# Altium PCB PCB2.PcbDoc (part 2 of 2)
Units mm, origin at the board's own origin, x right, y up, seen from the top; angles counter-clockwise.
Board outline 218 x 32 mm, 2 copper layers (Top Layer, Bottom Layer), stack 0.98 mm thick; 135 components, 91 nets, 363 pads, 97 vias.
Unrouted connection lines stored in the file: 1.
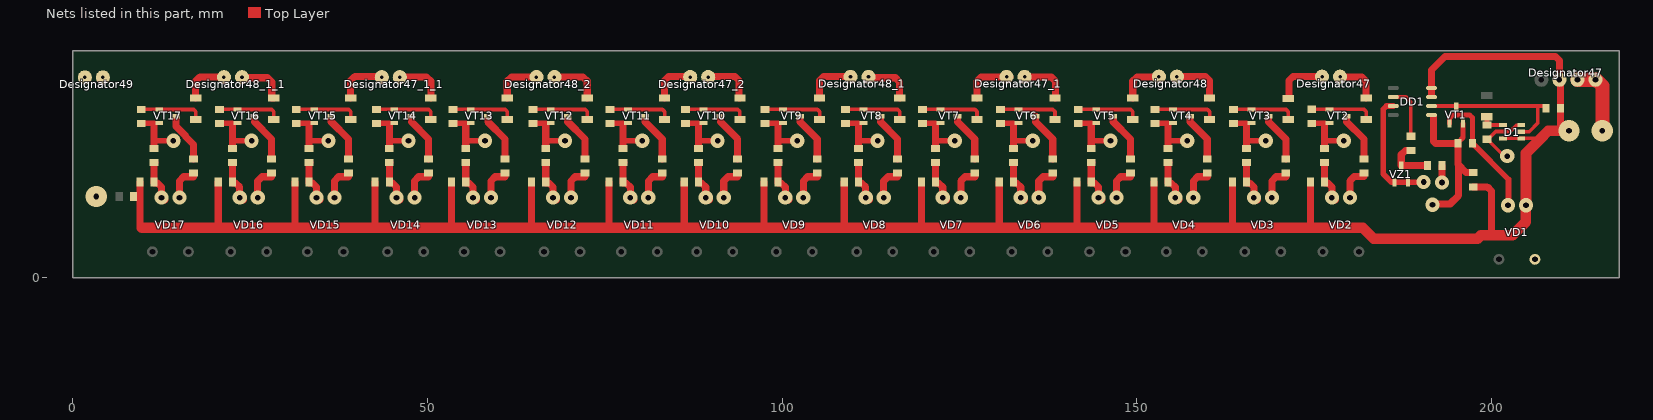
[diagram p2: the nets of this part, all layers, seen from the top]

## Via types
v1: diameter 2, hole 0.8, Top Layer to Bottom Layer, 54 vias
v2: diameter 3, hole 0.8, Top Layer to Bottom Layer, 39 vias
v3: diameter 5, hole 0.8, Top Layer to Bottom Layer, 2 vias
v4: diameter 7, hole 0.8, Top Layer to Bottom Layer, 2 vias

## Nets (pads, with @x,y where several pads share a name; then routed paths per layer and width w, separated by ;. In a path a pad name is that pad's centre, name@x,y a point inside that pad or via, vN(x,y) a via of type N, cw(c..) or ccw(c..) an arc to the next point about the centre after c; other vN are vias at no path point)
GND: C1.1 C2.1 C3.1 C4.1 C5.1 C6.1 C7.1 C8.1 C9.1 C10.1 C11.1 C12.1 C13.1 C14.1 C15.1 C16.1 C17.1 D1.3 DD1.5 Designator47.3 Designator47.4 Designator49.1 Designator49.2 R2.1 R3.1 R7.1 R11.1 R15.1 R19.1 R23.1 R27.1 R31.1 R35.1 R39.1 R43.1 R47.1 R51.1 R55.1 R59.1 R63.1 R67.1 VT1.2 VT2.2 VT3.2 VT4.2 VT5.2 VT6.2 VT7.2 VT8.2 VT9.2 VT10.2 VT11.2 VT12.2 VT13.2 VT14.2 VT15.2 VT16.2 VT17.2 | length 168.2
  Top Layer w0.5: R2.1@199.375,19.525 R2.1@199.5,19.525 ; R2.1@199.415,19.525 R2.1@199.5,19.525 ; v1(202.225,17.15) 201.79,17.15 199.75,19.19 199.75,19.275 R2.1@199.5,19.525 ; D1.3@204.2,21.55 204.15,21.5 203.475,21.5 202.6,20.625 200.6,20.625 R2.1@199.5,19.525
  Top Layer w0.7: R3.1@195.3,18.975 195.3,19.1 195.975,19.775 VT1.2@195.975,21.75
  Top Layer w0.8: R67.1@9.65,21.75 9.688,21.788 11.47,21.788 ; 11.47,19.325 v1(14.175,19.325) ; R63.1@20.68,21.75 20.718,21.788 22.5,21.788 ; 22.5,19.325 v1(25.205,19.325) ; R59.1@31.5,21.75 31.538,21.788 33.32,21.788 ; 33.32,19.325 v1(36.025,19.325) ; R55.1@42.8,21.75 42.838,21.788 44.62,21.788 ; 44.62,19.325 v1(47.325,19.325) ; R51.1@53.58,21.75 53.618,21.788 55.4,21.788 ; 55.4,19.325 v1(58.105,19.325) ; R47.1@64.85,21.75 64.888,21.788 66.67,21.788 ; 66.67,19.325 v1(69.375,19.325) ; R43.1@75.75,21.75 75.788,21.788 77.57,21.788 ; 77.57,19.325 v1(80.275,19.325) ; R39.1@86.38,21.75 86.418,21.788 88.2,21.788 ; 88.2,19.325 v1(90.905,19.325) ; R35.1@97.6,21.75 97.638,21.788 99.42,21.788 ; 99.42,19.325 v1(102.125,19.325) ; R31.1@108.93,21.75 108.968,21.788 110.75,21.788 ; 110.75,19.325 v1(113.455,19.325) ; R27.1@119.8,21.75 119.838,21.788 121.62,21.788 ; 121.62,19.325 v1(124.325,19.325) ; R23.1@130.79,21.75 130.828,21.788 132.61,21.788 ; 132.61,19.325 v1(135.315,19.325) ; R19.1@141.75,21.75 141.788,21.788 143.57,21.788 ; 143.57,19.325 v1(146.275,19.325) ; R15.1@152.58,21.75 152.618,21.788 154.4,21.788 ; 154.4,19.325 v1(157.105,19.325) ; R11.1@163.65,21.75 163.688,21.788 165.47,21.788 ; 165.47,19.325 v1(168.175,19.325) ; R7.1@174.655,21.755 174.693,21.793 176.475,21.793 ; 176.475,19.33 v1(179.18,19.33)
  Top Layer w1: C17.1@11.47,18.25 11.47,19.325 11.47,21.475 ; C16.1@22.5,18.25 22.5,19.325 22.5,21.475 ; C15.1@33.32,18.25 33.32,19.325 33.32,21.475 ; C14.1@44.62,18.25 44.62,19.325 44.62,21.475 ; C13.1@55.4,18.25 55.4,19.325 55.4,21.475 ; C12.1@66.67,18.25 66.67,19.325 66.67,21.475 ; C11.1@77.57,18.25 77.57,19.325 77.57,21.475 ; C10.1@88.2,18.25 88.2,19.325 88.2,21.475 ; C9.1@99.42,18.25 99.42,19.325 99.42,21.475 ; C8.1@110.75,18.25 110.75,19.325 110.75,21.475 ; C7.1@121.62,18.25 121.62,19.325 121.62,21.475 ; C6.1@132.61,18.25 132.61,19.325 132.61,21.475 ; C5.1@143.57,18.25 143.57,19.325 143.57,21.475 ; C4.1@154.4,18.25 154.4,19.325 154.4,21.475 ; C3.1@165.47,18.25 165.47,19.325 165.47,21.475 ; C2.1@176.475,18.255 176.475,19.33 176.475,21.48 ; v1(191.68,10.305) 191.805,10.43 194.18,10.43 195.325,11.575 195.325,15.925 ; DD1.5@191.825,22.745 191.825,19.24 192.132,18.932 R3.1@195.3,18.932 ; R3.1@195.3,18.975 R3.1@195.3,18.932 ; C1.1@197.425,14.825 196.425,14.825 195.325,15.925 ; R3.1@195.3,18.932 195.3,15.95 195.325,15.925
  Top Layer w2: Designator47.3@212.11,27.925 Designator47.4@214.65,27.925 214.728,27.925 215.625,27.029 v2(215.625,20.725)
  other v2: 3.3,11.45
NetC2_2: C2.2 R4.1 VD2.1 | length 6.3
  Top Layer w1: C2.2@176.6,16.255 C2.2@176.475,16.255 R4.1@176.475,13.505 176.475,13.38 176.914,13.38 177.5,12.794 177.5,11.5 VD2.1@178,11
  other v1: 177.5,11.305
NetC3_2: C3.2 R8.1 VD3.1 | length 6.3
  Top Layer w1: C3.2@165.595,16.25 C3.2@165.47,16.25 R8.1@165.47,13.5 165.47,13.375 165.909,13.375 166.495,12.789 166.495,11.495 VD3.1@166.995,10.995
  other v1: 166.495,11.3
NetC4_2: C4.2 R12.1 VD4.1 | length 6.3
  Top Layer w1: C4.2@154.525,16.25 C4.2@154.4,16.25 R12.1@154.4,13.5 154.4,13.375 154.839,13.375 155.425,12.789 155.425,11.495 VD4.1@155.925,10.995
  other v1: 155.425,11.3
NetC5_2: C5.2 R16.1 VD5.1 | length 6.3
  Top Layer w1: C5.2@143.695,16.25 C5.2@143.57,16.25 R16.1@143.57,13.5 143.57,13.375 144.009,13.375 144.595,12.789 144.595,11.495 VD5.1@145.095,10.995
  other v1: 144.595,11.3
NetC6_2: C6.2 R20.1 VD6.1 | length 6.3
  Top Layer w1: C6.2@132.735,16.25 C6.2@132.61,16.25 R20.1@132.61,13.5 132.61,13.375 133.049,13.375 133.635,12.789 133.635,11.495 VD6.1@134.135,10.995
  other v1: 133.635,11.3
NetC7_2: C7.2 R24.1 VD7.1 | length 6.3
  Top Layer w1: C7.2@121.745,16.25 C7.2@121.62,16.25 R24.1@121.62,13.5 121.62,13.375 122.059,13.375 122.645,12.789 122.645,11.495 VD7.1@123.145,10.995
  other v1: 122.645,11.3
NetC8_2: C8.2 R28.1 VD8.1 | length 6.3
  Top Layer w1: C8.2@110.875,16.25 C8.2@110.75,16.25 R28.1@110.75,13.5 110.75,13.375 111.189,13.375 111.775,12.789 111.775,11.495 VD8.1@112.275,10.995
  other v1: 111.775,11.3
NetC9_2: C9.2 R32.1 VD9.1 | length 6.3
  Top Layer w1: C9.2@99.545,16.25 C9.2@99.42,16.25 R32.1@99.42,13.5 99.42,13.375 99.859,13.375 100.445,12.789 100.445,11.495 VD9.1@100.945,10.995
  other v1: 100.445,11.3
NetC10_2: C10.2 R36.1 VD10.1 | length 6.3
  Top Layer w1: C10.2@88.325,16.25 C10.2@88.2,16.25 R36.1@88.2,13.5 88.2,13.375 88.639,13.375 89.225,12.789 89.225,11.495 VD10.1@89.725,10.995
  other v1: 89.225,11.3
NetC11_2: C11.2 R40.1 VD11.1 | length 6.3
  Top Layer w1: C11.2@77.695,16.25 C11.2@77.57,16.25 R40.1@77.57,13.5 77.57,13.375 78.009,13.375 78.595,12.789 78.595,11.495 VD11.1@79.095,10.995
  other v1: 78.595,11.3
NetC12_2: C12.2 R44.1 VD12.1 | length 6.3
  Top Layer w1: C12.2@66.795,16.25 C12.2@66.67,16.25 R44.1@66.67,13.5 66.67,13.375 67.109,13.375 67.695,12.789 67.695,11.495 VD12.1@68.195,10.995
  other v1: 67.695,11.3
NetC13_2: C13.2 R48.1 VD13.1 | length 6.3
  Top Layer w1: C13.2@55.525,16.25 C13.2@55.4,16.25 R48.1@55.4,13.5 55.4,13.375 55.839,13.375 56.425,12.789 56.425,11.495 VD13.1@56.925,10.995
  other v1: 56.425,11.3
NetC14_2: C14.2 R52.1 VD14.1 | length 6.3
  Top Layer w1: C14.2@44.745,16.25 C14.2@44.62,16.25 R52.1@44.62,13.5 44.62,13.375 45.059,13.375 45.645,12.789 45.645,11.495 VD14.1@46.145,10.995
  other v1: 45.645,11.3
NetC15_2: C15.2 R56.1 VD15.1 | length 6.3
  Top Layer w1: C15.2@33.445,16.25 C15.2@33.32,16.25 R56.1@33.32,13.5 33.32,13.375 33.759,13.375 34.345,12.789 34.345,11.495 VD15.1@34.845,10.995
  other v1: 34.345,11.3
NetC16_2: C16.2 R60.1 VD16.1 | length 6.3
  Top Layer w1: C16.2@22.625,16.25 C16.2@22.5,16.25 R60.1@22.5,13.5 22.5,13.375 22.939,13.375 23.525,12.789 23.525,11.495 VD16.1@24.025,10.995
  other v1: 23.525,11.3
NetC17_2: C17.2 R64.1 VD17.1 | length 6.3
  Top Layer w1: C17.2@11.595,16.25 C17.2@11.47,16.25 R64.1@11.47,13.5 11.47,13.375 11.909,13.375 12.495,12.789 12.495,11.495 VD17.1@12.995,10.995
  other v1: 12.495,11.3
NetD1_2: D1.2 DD1.6 R1.1 VT1.3 | length 21.7
  Top Layer w0.5: DD1.6@191.55,24.215 206.54,24.215 ; D1.2@204.2,20.6 205.325,20.6 206.54,21.815 206.54,24.215 ; R1.1@207.7,23.8 207.69,23.79 207.69,23.975 207.45,24.215 206.54,24.215
NetD1_4: D1.4 R2.2 R68.2 | length 3.4
  Top Layer w0.5: R2.2@199.375,21.525 199.388,21.537 201.587,21.537 D1.4@201.6,21.55
  Top Layer w0.7: R68.2@199.335,22.7 199.355,22.68 199.355,21.545 R2.2@199.375,21.525
NetDD1_2: DD1.2 R1.2.1 | length 7.6
  Top Layer w0.5: DD1.2@186.15,25.485 187.94,25.485 188.625,24.8 R1.2.1@188.625,19.95
NetDD1_3: DD1.3 VZ1.1 VZ1.2 | length 16.6
  Top Layer w0.8: 186.025,13.475 185.917,13.475 184.725,14.667 184.725,23.746 185.194,24.215 DD1.3@186.15,24.215 ; VZ1.1@186.325,13.425 186.37,13.47 188.225,13.47 190.38,13.47 v1(190.425,13.515)
NetR1.1_1: R1.1.1 R1.2.2 VZ1.3 | length 6.9
  Top Layer w1: R1.2.2@188.625,17.95 187.861,17.95 187.275,17.364 VZ1.3@187.275,15.825 191,15.825 R1.1.1@191,15.85
NetR1.1_2: R1.1.2 | length 2.4
  Top Layer w1: R1.1.2@193,15.85 193,13.454 v1(193.025,13.429)
NetR3_2: R3.2 VD1.1 VT1.1 | length 18.8
  Top Layer w0.7: VT1.1@194.075,21.75 194.075,22.525 194.525,22.975 196.89,22.975 197.3,22.565 R3.2@197.3,18.975
  Top Layer w0.8: R3.2@197.3,18.85 197.4,18.75 197.525,18.75 202.4,13.875 202.4,10.305 v1(202.315,10.22)
NetR5_1: R5.1 VT2.3 | length 6.1
  Top Layer w1: 179.58,22.325 179.58,22 182.005,19.575 R5.1@182.005,17.2
NetR5_2: R5.2 VD2.2 | length 4.6
  Top Layer w1: v1(180.04,11.305) 180.04,13.669 180.626,14.255 R5.2@182.005,14.255
NetR6_1: Designator47.1@178.65,28.35 R6.1 | length 6.3
  Top Layer w1: Designator47.1@178.65,28.35 178.7,28.3 181.739,28.3 182.325,27.714 R6.1@182.325,25.33
NetR6_2: R6.2 R7.2 VT2.1 | length 9
  Top Layer w0.5: R7.2@174.705,23.755 VT2.1@177.23,23.755 ; VT2.1@177.23,23.73 182.032,23.73 182.325,23.437 R6.2@182.325,22.13
NetR9_1: R9.1 VT3.3 | length 6.6
  Top Layer w1: 168.575,22.375 168.575,21.995 171,19.57 R9.1@171,16.75
NetR9_2: R9.2 VD3.2 | length 4.6
  Top Layer w1: v1(169.035,11.3) 169.035,13.664 169.621,14.25 R9.2@171,14.25
NetR10_1: Designator47.2@176.11,28.35 R10.1 | length 7.6
  Top Layer w1: R10.1@171.45,25.3 171.45,27.814 172.036,28.4 Designator47.2@176.265,28.4
NetR10_2: R10.2 R11.2 VT3.1 | length 9
  Top Layer w0.5: R11.2@163.7,23.75 VT3.1@166.225,23.75 ; VT3.1@166.225,23.725 171.027,23.725 171.32,23.432 R10.2@171.32,22.125
NetR13_1: R13.1 VT4.3 | length 6.4
  Top Layer w1: 157.505,22.45 157.505,21.995 159.93,19.57 R13.1@159.93,17.05
NetR13_2: R13.2 VD4.2 | length 4.6
  Top Layer w1: v1(157.965,11.3) 157.965,13.664 158.551,14.25 R13.2@159.93,14.25
NetR14_1: Designator48.1 R14.1 | length 7.2
  Top Layer w1: Designator48.1@155.766,28.4 159.664,28.4 160.25,27.814 R14.1@160.25,25.325
NetR14_2: R14.2 R15.2 VT4.1 | length 9
  Top Layer w0.5: R15.2@152.63,23.75 VT4.1@155.155,23.75 ; VT4.1@155.155,23.725 159.957,23.725 160.25,23.432 R14.2@160.25,22.125
NetR17_1: R17.1 VT5.3 | length 6.4
  Top Layer w1: 146.675,22.45 146.675,21.995 149.1,19.57 R17.1@149.1,17.05
NetR17_2: R17.2 VD5.2 | length 4.6
  Top Layer w1: v1(147.135,11.3) 147.135,13.664 147.721,14.25 R17.2@149.1,14.25
NetR18_1: Designator48.2 R18.1 | length 6.4
  Top Layer w1: R18.1@149.42,25.325 149.42,27.714 150.006,28.3 Designator48.2@153.236,28.3
NetR18_2: R18.2 R19.2 VT5.1 | length 9
  Top Layer w0.5: R19.2@141.8,23.75 VT5.1@144.325,23.75 ; VT5.1@144.325,23.725 149.127,23.725 149.42,23.432 R18.2@149.42,22.125
NetR21_1: R21.1 VT6.3 | length 7
  Top Layer w1: VT6.3@135.715,22.775 135.715,21.995 138.14,19.57 R21.1@138.14,16.75
NetR21_2: R21.2 VD6.2 | length 4.6
  Top Layer w1: v1(136.175,11.3) 136.175,13.664 136.761,14.25 R21.2@138.14,14.25
NetR22_1: Designator47_1.1 R22.1 | length 6.7
  Top Layer w1: Designator47_1.1@134.495,28.3 137.939,28.3 138.525,27.714 138.525,25.325 R22.1@138.46,25.325
NetR22_2: R22.2 R23.2 VT6.1 | length 9
  Top Layer w0.5: R23.2@130.84,23.75 VT6.1@133.365,23.75 ; VT6.1@133.365,23.725 138.167,23.725 138.46,23.432 R22.2@138.46,22.125
NetR25_1: R25.1 VT7.3 | length 6.7
  Top Layer w1: 124.725,22.425 124.725,21.995 127.15,19.57 R25.1@127.15,16.75
NetR25_2: R25.2 VD7.2 | length 4.6
  Top Layer w1: v1(125.185,11.3) 125.185,13.664 125.771,14.25 R25.2@127.15,14.25
NetR26_1: Designator47_1.2 R26.1 | length 7.3
  Top Layer w1: R26.1@127.47,25.325 127.47,27.74 128.056,28.325 Designator47_1.2@132.144,28.325
NetR26_2: R26.2 R27.2 VT7.1 | length 9
  Top Layer w0.5: R27.2@119.85,23.75 VT7.1@122.375,23.75 ; VT7.1@122.375,23.725 127.177,23.725 127.47,23.432 R26.2@127.47,22.125
NetR29_1: R29.1 VT8.3 | length 6.7
  Top Layer w1: 113.855,22.4 113.855,21.995 116.28,19.57 R29.1@116.28,16.75
NetR29_2: R29.2 VD8.2 | length 4.6
  Top Layer w1: v1(114.315,11.3) 114.315,13.664 114.901,14.25 R29.2@116.28,14.25
NetR30_1: Designator48_1.1 R30.1 | length 6.8
  Top Layer w1: Designator48_1.1@112.317,28.2 115.964,28.2 116.55,27.614 116.55,25.325 R30.1@116.6,25.325
NetR30_2: R30.2 R31.2 VT8.1 | length 9
  Top Layer w0.5: R31.2@108.98,23.75 VT8.1@111.505,23.75 ; VT8.1@111.505,23.725 116.307,23.725 116.6,23.432 R30.2@116.6,22.125
NetR33_1: R33.1 VT9.3 | length 6.7
  Top Layer w1: 102.525,22.45 102.525,21.995 104.95,19.57 R33.1@104.95,16.75
NetR33_2: R33.2 VD9.2 | length 4.6
  Top Layer w1: v1(102.985,11.3) 102.985,13.664 103.571,14.25 R33.2@104.95,14.25
NetR34_1: Designator48_1.2 R34.1 | length 6.9
  Top Layer w1: R34.1@105.27,25.325 105.27,27.814 105.856,28.4 Designator48_1.2@109.436,28.4
NetR34_2: R34.2 R35.2 VT9.1 | length 9
  Top Layer w0.5: R35.2@97.65,23.75 VT9.1@100.175,23.75 ; VT9.1@100.175,23.725 104.977,23.725 105.27,23.432 R34.2@105.27,22.125
NetR37_1: R37.1 VT10.3 | length 6.6
  Top Layer w1: 91.305,22.375 91.305,21.995 93.73,19.57 R37.1@93.73,16.75
NetR37_2: R37.2 VD10.2 | length 4.6
  Top Layer w1: v1(91.765,11.3) 91.765,13.664 92.351,14.25 R37.2@93.73,14.25
NetR38_1: Designator47_2.1 R38.1 | length 7.2
  Top Layer w1: Designator47_2.1@89.535,28.4 93.339,28.4 93.925,27.814 93.925,25.325 R38.1@94.05,25.325
NetR38_2: R38.2 R39.2 VT10.1 | length 9
  Top Layer w0.5: R39.2@86.43,23.75 VT10.1@88.955,23.75 ; VT10.1@88.955,23.725 93.757,23.725 94.05,23.432 R38.2@94.05,22.125
NetR41_1: R41.1 VT11.3 | length 6.6
  Top Layer w1: 80.675,22.35 80.675,21.995 83.1,19.57 R41.1@83.1,16.75
NetR41_2: R41.2 VD11.2 | length 4.6
  Top Layer w1: v1(81.135,11.3) 81.135,13.664 81.721,14.25 R41.2@83.1,14.25
NetR42_1: Designator47_2.2 R42.1 | length 6.4
  Top Layer w1: R42.1@83.42,25.325 83.42,27.814 84.006,28.4 86.935,28.4 Designator47_2.2@87.035,28.3
NetR42_2: R42.2 R43.2 VT11.1 | length 9
  Top Layer w0.5: R43.2@75.8,23.75 VT11.1@78.325,23.75 ; VT11.1@78.325,23.725 83.127,23.725 83.42,23.432 R42.2@83.42,22.125
NetR45_1: R45.1 VT12.3 | length 6.3
  Top Layer w1: 69.775,22.375 69.775,21.995 72.2,19.57 R45.1@72.2,17.1
NetR45_2: R45.2 VD12.2 | length 4.6
  Top Layer w1: v1(70.235,11.3) 70.235,13.664 70.821,14.25 R45.2@72.2,14.25
NetR46_1: Designator48_2.1 R46.1 | length 7.6
  Top Layer w1: Designator48_2.1@67.6,28.3 70,28.3 71.934,28.3 72.52,27.714 R46.1@72.52,25.325
NetR46_2: R46.2 R47.2 VT12.1 | length 9
  Top Layer w0.5: R47.2@64.9,23.75 VT12.1@67.425,23.75 ; VT12.1@67.425,23.725 72.227,23.725 72.52,23.432 R46.2@72.52,22.125
NetR49_1: R49.1 VT13.3 | length 6.4
  Top Layer w1: 58.505,22.325 58.505,21.995 60.93,19.57 R49.1@60.93,16.975
NetR49_2: R49.2 VD13.2 | length 4.6
  Top Layer w1: v1(58.965,11.3) 58.965,13.664 59.551,14.25 R49.2@60.93,14.25
NetR50_1: Designator48_2.2 R50.1 | length 6.7
  Top Layer w1: R50.1@61.25,25.325 61.25,27.715 61.836,28.3 Designator48_2.2@65.36,28.3
NetR50_2: R50.2 R51.2 VT13.1 | length 9
  Top Layer w0.5: R51.2@53.63,23.75 VT13.1@56.155,23.75 ; VT13.1@56.155,23.725 60.957,23.725 61.25,23.432 R50.2@61.25,22.125
NetR53_1: R53.1 VT14.3 | length 6.7
  Top Layer w1: 47.725,22.425 47.725,21.995 50.15,19.57 R53.1@50.15,16.75
NetR53_2: R53.2 VD14.2 | length 4.6
  Top Layer w1: v1(48.185,11.3) 48.185,13.664 48.771,14.25 R53.2@50.15,14.25
NetR54_1: Designator47_1_1.1 R54.1 | length 7
  Top Layer w1: Designator47_1_1.1@46.1,28.275 46.125,28.3 49.884,28.3 50.47,27.714 R54.1@50.47,25.325
NetR54_2: R54.2 R55.2 VT14.1 | length 9
  Top Layer w0.5: R55.2@42.85,23.75 VT14.1@45.375,23.75 ; VT14.1@45.375,23.725 50.177,23.725 50.47,23.432 R54.2@50.47,22.125
NetR57_1: R57.1 VT15.3 | length 6.4
  Top Layer w1: 36.425,22.375 36.425,21.995 38.85,19.57 R57.1@38.85,17.025
NetR57_2: R57.2 VD15.2 | length 4.6
  Top Layer w1: v1(36.885,11.3) 36.885,13.664 37.471,14.25 R57.2@38.85,14.25
NetR58_1: Designator47_1_1.2 R58.1 | length 7
  Top Layer w1: R58.1@39.17,25.325 39.17,27.814 39.756,28.4 Designator47_1_1.2@43.44,28.4
NetR58_2: R58.2 R59.2 VT15.1 | length 9
  Top Layer w0.5: R59.2@31.55,23.75 VT15.1@34.075,23.75 ; VT15.1@34.075,23.725 38.877,23.725 39.17,23.432 R58.2@39.17,22.125
NetR61_1: R61.1 VT16.3 | length 6.3
  Top Layer w1: 25.605,22.375 25.605,21.995 28.03,19.57 R61.1@28.03,17.075
NetR61_2: R61.2 VD16.2 | length 4.6
  Top Layer w1: v1(26.065,11.3) 26.065,13.664 26.651,14.25 R61.2@28.03,14.25
NetR62_1: Designator48_1_1.1 R62.1 | length 7.1
  Top Layer w1: Designator48_1_1.1@23.76,28.2 27.464,28.2 28.05,27.614 28.05,25.325 R62.1@28.35,25.325
NetR62_2: R62.2 R63.2 VT16.1 | length 9
  Top Layer w0.5: R63.2@20.73,23.75 VT16.1@23.255,23.75 ; VT16.1@23.255,23.725 28.057,23.725 28.35,23.432 R62.2@28.35,22.125
NetR65_1: R65.1 VT17.3 | length 6.8
  Top Layer w1: VT17.3@14.575,22.575 14.575,21.329 15.875,20.029 15.875,19.925 17,18.8 R65.1@17,16.75
NetR65_2: R65.2 VD17.2 | length 4.6
  Top Layer w1: v1(15.035,11.3) 15.035,13.664 15.621,14.25 R65.2@17,14.25
NetR66_1: Designator48_1_1.2 R66.1 | length 6.9
  Top Layer w1: R66.1@17.32,25.325 17.32,27.714 17.906,28.3 Designator48_1_1.2@21.554,28.3
NetR66_2: R66.2 R67.2 VT17.1 | length 9
  Top Layer w0.5: R67.2@9.7,23.75 VT17.1@12.225,23.75 ; VT17.1@12.225,23.725 17.027,23.725 17.32,23.432 R66.2@17.32,22.125
NetX3_33: 
NetX3_35: 
VCC: C1.2 D1.1 D1.5 DD1.7 DD1.8 Designator47.2@209.57,27.925 Designator54.1 R1.2 R4.2 R8.2 R12.2 R16.2 R20.2 R24.2 R28.2 R32.2 R36.2 R40.2 R44.2 R48.2 R52.2 R56.2 R60.2 R64.2 VD1.2 VD1.4 | length 363.3
  Top Layer w0.5: D1.5@201.6,19.65 D1.1@204.2,19.65 206.875,19.65 206.904,19.621
  Top Layer w1: 9.47,7.161 R64.2@9.47,13.5 ; 20.38,7.041 20.5,7.161 R60.2@20.5,13.5 ; 31.2,7.041 31.32,7.161 R56.2@31.32,13.5 ; 42.5,7.041 42.62,7.161 R52.2@42.62,13.5 ; 53.28,7.041 53.4,7.161 R48.2@53.4,13.5 ; 64.55,7.041 64.67,7.161 R44.2@64.67,13.5 ; 75.45,7.041 75.57,7.161 R40.2@75.57,13.5 ; 86.08,7.041 86.2,7.161 R36.2@86.2,13.5 ; 97.3,7.041 97.42,7.161 R32.2@97.42,13.5 ; 108.63,7.041 108.75,7.161 R28.2@108.75,13.5 ; 119.5,7.041 119.62,7.161 R24.2@119.62,13.5 ; 130.49,7.041 130.61,7.161 R20.2@130.61,13.5 ; 141.45,7.041 141.57,7.161 R16.2@141.57,13.5 ; 152.28,7.041 152.4,7.161 R12.2@152.4,13.5 ; 163.35,7.041 163.47,7.161 R8.2@163.47,13.5 ; 174.355,7.046 174.475,7.166 R4.2@174.475,13.505 ; 191.55,25.9 DD1.8@191.55,26.755 191.55,29.3 193.45,31.2 209.014,31.2 209.6,30.614 209.6,27.955 Designator47.2@209.57,27.925 209.7,27.795 R1.2@209.7,23.9 209.7,20.967 v2@209.471,20.738 ; C1.2@197.425,12.825 199.389,12.825 199.975,12.239 199.975,6.275 200.25,6
  Top Layer w1.5: 9.75,7.041 20.38,7.041 31.2,7.041 42.5,7.041 53.28,7.041 64.55,7.041 75.45,7.041 86.08,7.041 97.3,7.041 108.63,7.041 119.5,7.041 130.49,7.041 141.45,7.041 152.28,7.041 163.35,7.041 174.35,7.041 ; 174.355,7.046 181.838,7.046 183.375,5.509 198.022,5.509 198.513,6 200.25,6 202.95,6 204.85,7.9 204.85,10.215 v1(204.855,10.22) 204.855,17.572 206.904,19.621 208.021,20.738 v2@209.471,20.738
  other v2: 210.921,20.738
pads on no net: D1. DD1.1 DD1.4 DD1.28 Designator47. Designator47.1@207.03,27.925 Designator47_1. Designator47_1_1. Designator47_2. Designator48. Designator48_1. Designator48_1_1. Designator48_2. Designator49. Designator54.2 R68.1 VD1.3 VD2.3 VD2.4 VD3.3 VD3.4 VD4.3 VD4.4 VD5.3 VD5.4 VD6.3 VD6.4 VD7.3 VD7.4 VD8.3 VD8.4 VD9.3 VD9.4 VD10.3 VD10.4 VD11.3 VD11.4 VD12.3 VD12.4 VD13.3 VD13.4 VD14.3 VD14.4 VD15.3 VD15.4 VD16.3 VD16.4 VD17.3 VD17.4 VT1. VT2. VT3. VT4. VT5. VT6. VT7. VT8. VT9. VT10. VT11. VT12. VT13. VT14. VT15. VT16. VT17. VZ1.
copper on no net: | length 486.6
  Top Layer w0.8: 9.65,21.75 9.688,21.788 11.47,21.788 ; 11.47,19.325 14.175,19.325 ; 20.68,21.75 20.718,21.788 22.5,21.788 ; 22.5,19.325 25.205,19.325 ; 31.5,21.75 31.538,21.788 33.32,21.788 ; 33.32,19.325 36.025,19.325 ; 42.8,21.75 42.838,21.788 44.62,21.788 ; 44.62,19.325 47.325,19.325 ; 53.58,21.75 53.618,21.788 55.4,21.788 ; 55.4,19.325 58.105,19.325 ; 64.85,21.75 64.888,21.788 66.67,21.788 ; 66.67,19.325 69.375,19.325 ; 75.75,21.75 75.788,21.788 77.57,21.788 ; 77.57,19.325 80.275,19.325 ; 86.38,21.75 86.418,21.788 88.2,21.788 ; 88.2,19.325 90.905,19.325 ; 97.6,21.75 97.638,21.788 99.42,21.788 ; 99.42,19.325 102.125,19.325 ; 108.93,21.75 108.968,21.788 110.75,21.788 ; 110.75,19.325 113.455,19.325 ; 119.8,21.75 119.838,21.788 121.62,21.788 ; 121.62,19.325 124.325,19.325 ; 130.79,21.75 130.828,21.788 132.61,21.788 ; 132.61,19.325 135.315,19.325 ; 141.75,21.75 141.788,21.788 143.57,21.788 ; 143.57,19.325 146.275,19.325 ; 152.58,21.75 152.618,21.788 154.4,21.788 ; 154.4,19.325 157.105,19.325 ; 174.655,21.755 174.693,21.793 176.475,21.793 ; 176.475,19.33 179.18,19.33
  Top Layer w1: 3.3,11.475 6.375,11.475 ; 11.47,18.25 11.47,19.325 11.47,21.475 ; 11.595,16.25 11.47,16.25 11.47,13.5 11.47,13.375 11.909,13.375 12.495,12.789 12.495,11.495 12.995,10.995 ; 15.035,11.3 15.035,13.664 15.621,14.25 17,14.25 ; 22.5,18.25 22.5,19.325 22.5,21.475 ; 22.625,16.25 22.5,16.25 22.5,13.5 22.5,13.375 22.939,13.375 23.525,12.789 23.525,11.495 24.025,10.995 ; 26.065,11.3 26.065,13.664 26.651,14.25 28.03,14.25 ; 33.32,18.25 33.32,19.325 33.32,21.475 ; 33.445,16.25 33.32,16.25 33.32,13.5 33.32,13.375 33.759,13.375 34.345,12.789 34.345,11.495 34.845,10.995 ; 36.885,11.3 36.885,13.664 37.471,14.25 38.85,14.25 ; 44.62,18.25 44.62,19.325 44.62,21.475 ; 44.745,16.25 44.62,16.25 44.62,13.5 44.62,13.375 45.059,13.375 45.645,12.789 45.645,11.495 46.145,10.995 ; 48.185,11.3 48.185,13.664 48.771,14.25 50.15,14.25 ; 55.4,18.25 55.4,19.325 55.4,21.475 ; 55.525,16.25 55.4,16.25 55.4,13.5 55.4,13.375 55.839,13.375 56.425,12.789 56.425,11.495 56.925,10.995 ; 58.965,11.3 58.965,13.664 59.551,14.25 60.93,14.25 ; 66.67,18.25 66.67,19.325 66.67,21.475 ; 66.795,16.25 66.67,16.25 66.67,13.5 66.67,13.375 67.109,13.375 67.695,12.789 67.695,11.495 68.195,10.995 ; 70.235,11.3 70.235,13.664 70.821,14.25 72.2,14.25 ; 77.57,18.25 77.57,19.325 77.57,21.475 ; 77.695,16.25 77.57,16.25 77.57,13.5 77.57,13.375 78.009,13.375 78.595,12.789 78.595,11.495 79.095,10.995 ; 81.135,11.3 81.135,13.664 81.721,14.25 83.1,14.25 ; 88.2,18.25 88.2,19.325 88.2,21.475 ; 88.325,16.25 88.2,16.25 88.2,13.5 88.2,13.375 88.639,13.375 89.225,12.789 89.225,11.495 89.725,10.995 ; 91.765,11.3 91.765,13.664 92.351,14.25 93.73,14.25 ; 99.42,18.25 99.42,19.325 99.42,21.475 ; 99.545,16.25 99.42,16.25 99.42,13.5 99.42,13.375 99.859,13.375 100.445,12.789 100.445,11.495 100.945,10.995 ; 102.985,11.3 102.985,13.664 103.571,14.25 104.95,14.25 ; 110.75,18.25 110.75,19.325 110.75,21.475 ; 110.875,16.25 110.75,16.25 110.75,13.5 110.75,13.375 111.189,13.375 111.775,12.789 111.775,11.495 112.275,10.995 ; 114.315,11.3 114.315,13.664 114.901,14.25 116.28,14.25 ; 121.62,18.25 121.62,19.325 121.62,21.475 ; 121.745,16.25 121.62,16.25 121.62,13.5 121.62,13.375 122.059,13.375 122.645,12.789 122.645,11.495 123.145,10.995 ; 125.185,11.3 125.185,13.664 125.771,14.25 127.15,14.25 ; 132.61,18.25 132.61,19.325 132.61,21.475 ; 132.735,16.25 132.61,16.25 132.61,13.5 132.61,13.375 133.049,13.375 133.635,12.789 133.635,11.495 134.135,10.995 ; 136.175,11.3 136.175,13.664 136.761,14.25 138.14,14.25 ; 143.57,18.25 143.57,19.325 143.57,21.475 ; 143.695,16.25 143.57,16.25 143.57,13.5 143.57,13.375 144.009,13.375 144.595,12.789 144.595,11.495 145.095,10.995 ; 147.135,11.3 147.135,13.664 147.721,14.25 149.1,14.25 ; 154.4,18.25 154.4,19.325 154.4,21.475 ; 154.525,16.25 154.4,16.25 154.4,13.5 154.4,13.375 154.839,13.375 155.425,12.789 155.425,11.495 155.925,10.995 ; 157.965,11.3 157.965,13.664 158.551,14.25 159.93,14.25 ; 176.475,18.255 176.475,19.33 176.475,21.48 ; 176.6,16.255 176.475,16.255 176.475,13.505 176.475,13.38 176.914,13.38 177.5,12.794 177.5,11.5 178,11 ; 180.04,11.305 180.04,13.669 180.626,14.255 182.005,14.255 ; 199.335,25.7 199.335,27.339 199.921,27.925 207.03,27.925
  Top Layer w2: v2@10.99,2.52 181.07,2.52 v2@205.88,2.52
  other v2: 201.045,2.6 206.125,2.6 11.225,3.68 16.305,3.68 22.255,3.68 27.335,3.68 33.075,3.68 38.155,3.68 44.375,3.68 49.455,3.68 55.155,3.68 60.235,3.68 66.425,3.68 71.505,3.68 77.325,3.68 82.405,3.68 87.955,3.68 93.035,3.68 99.175,3.68 104.255,3.68 110.505,3.68 115.585,3.68 121.375,3.68 126.455,3.68 132.365,3.68 137.445,3.68 143.325,3.68 148.405,3.68 154.155,3.68 159.235,3.68 165.225,3.68 170.305,3.68 176.23,3.685 181.31,3.685 186.882,8.259 196.883,8.259
  other v3: 211,15.95 6.136,16.05
  other v4: 212.5,5.5 5.575,5.575

## Polygon pours and split planes (outlines as drawn)
GND on Top Layer "GND_L01_P005" (solid, pour order 5): 0.3,31.7 0.3,23 6,23 6,31.7
no net on Top Layer "NONET_L01_P001" (solid, pour order 1): 216.7,23.3
GND on Bottom Layer "GND_L02_P000" (solid, pour order 0): 218,33.95 218,0 0,0 0.001,0.001 0.001,33.946

## Silkscreen, mask and mechanical layers (free items; w line width, h text height)
Border:
  lines w0.2: 0,0 0,32 10.45,32 210.531,32 218,32 218,13.25 218,0 208.5,0 8.5,0 0,0